# EAGLE board ME433 (EAGLE 7.3.0)
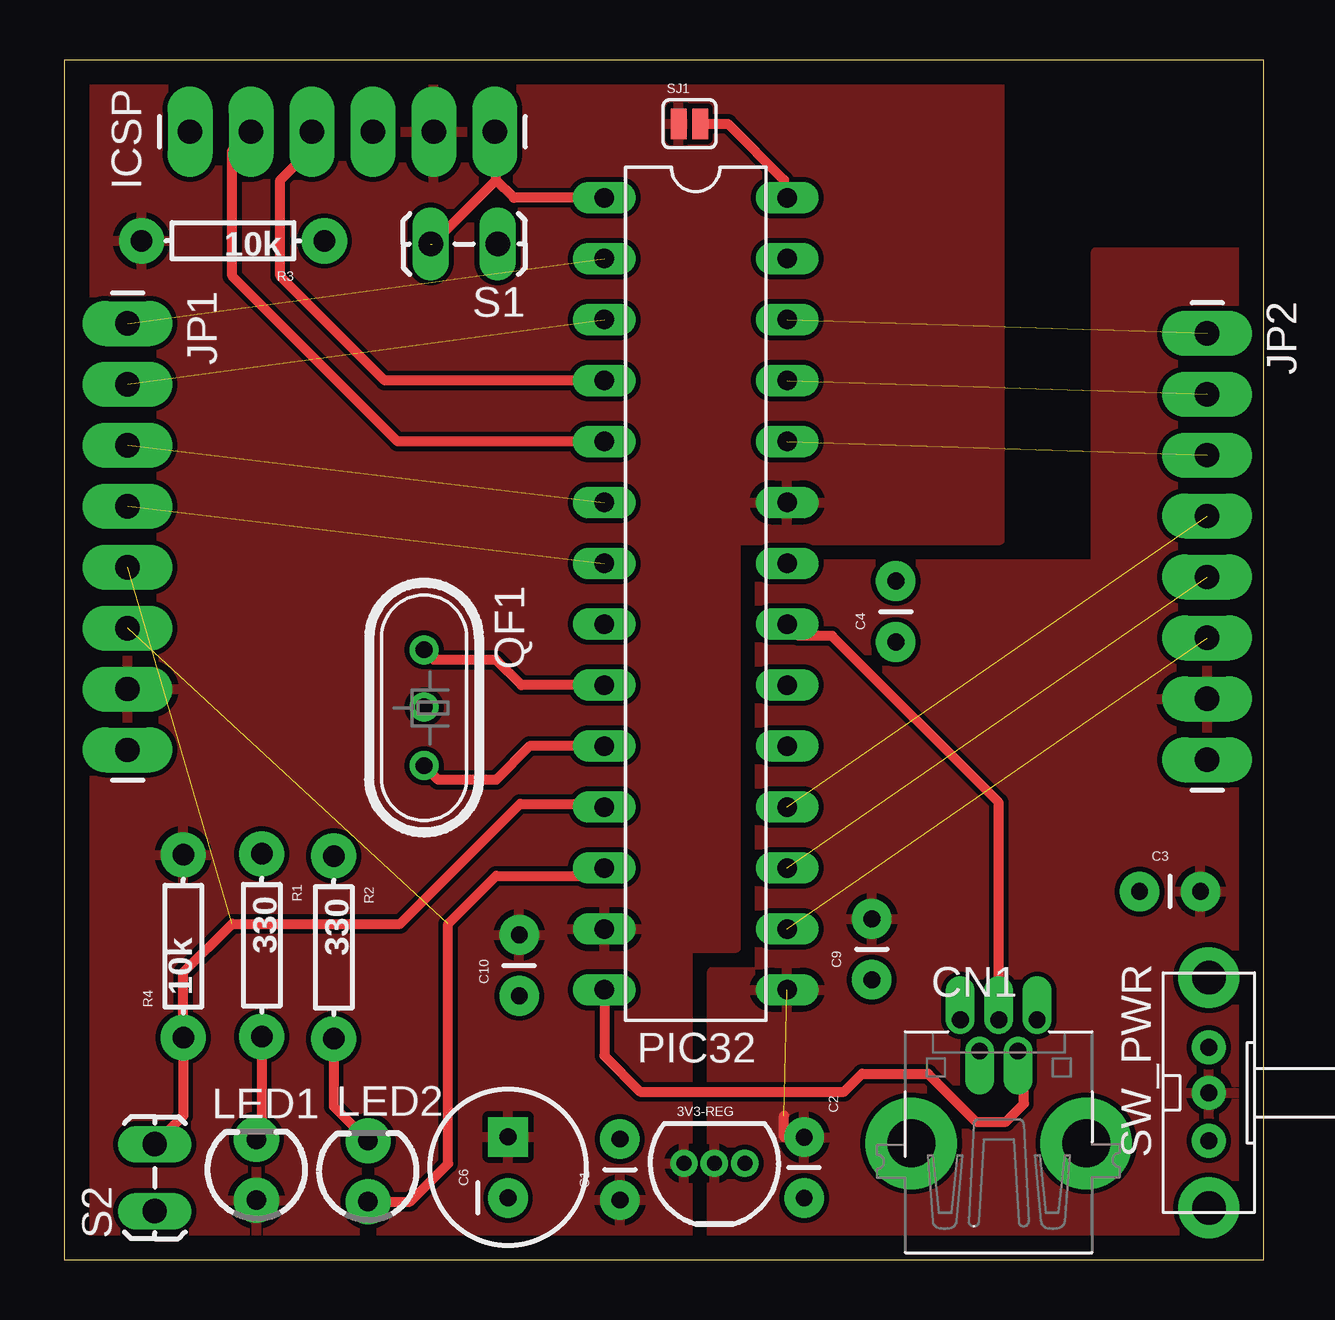
[diagram p0: board, top side]
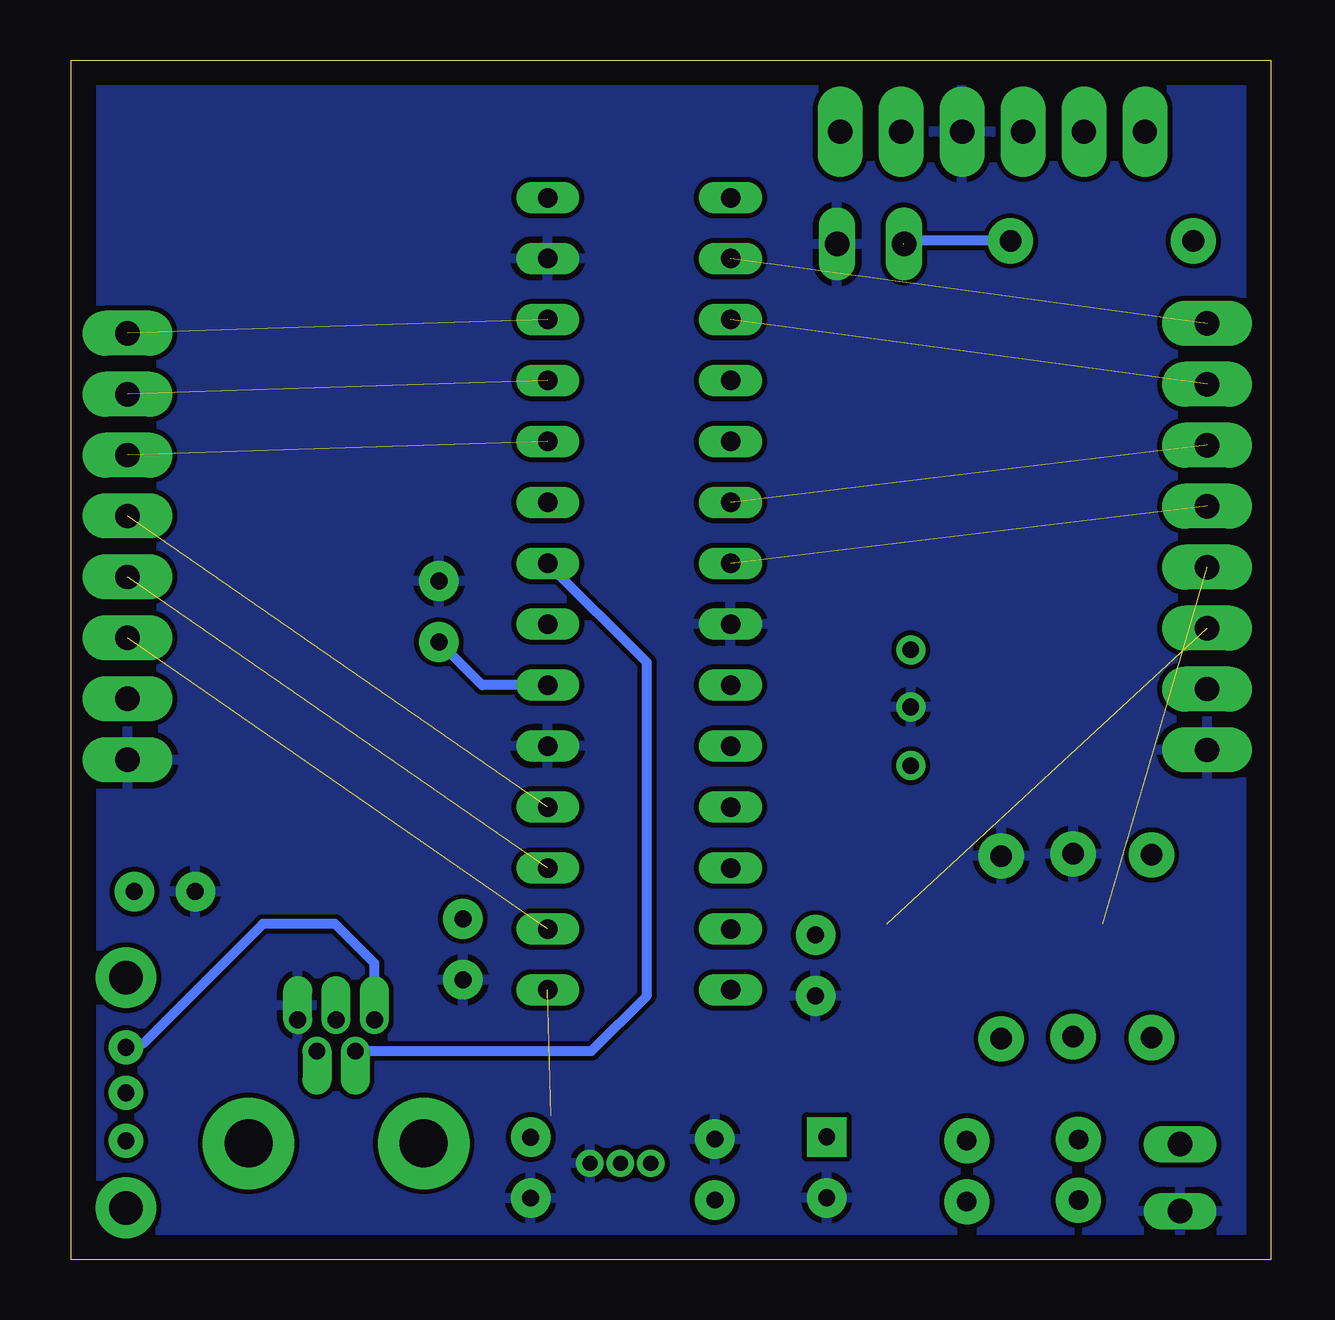
[diagram p1: board, bottom side, seen from below]

Size 50 x 50 mm. Coordinates in mm from the lower left corner, seen from the top.
Outline: 0,0 50,0 50,50 0,50 0,0
Copper layers (1*16): Top 0.035mm / dielectric 1.5mm / Bottom 0.035mm
Design rules "default": minimum track width 10mil, minimum drill 24mil, track to track 8mil, track to pad 8mil, pad to pad 8mil, via to via 8mil, smd to smd 8mil, copper to edge 40mil, drill to drill 8mil, minimum pad ring 10mil, minimum via ring 8mil, stop-mask expansion 4mil, vias tented up to drill 0mil, thermal gap 10mil

## Footprints (pad centres in the part's own frame; a part is rotated, then mirrored left to right if it is on the bottom)
TO-92 = drill 0.635 pad 1.016: 1 1.27,0; 2 0,0; 3 -1.27,0
CAP-PTH-SMALL = drill 0.7 pad 1.651: 1 0,0; 2 2.54,0
CPOL-RADIAL-100UF-25V = drill 0.7 pad 1.651 square: 1 1.27,0 | drill 0.7 pad 1.651: 2 -1.27,0
USB-MINIB-THM-MOLEX = drill 0.7 offset: D+ 0,9.72; D- -0.8,8.42; GND 1.6,9.72; ID 0.8,8.42; VBUS -1.6,9.72 | drill 2 pad 3.81: GND1 -3.65,4.57; GND4 3.65,4.57
1X06_LONGPADS = drill 1.016 pad 1.88 long: 1 0,0; 2 2.54,0; 3 5.08,0; 4 7.62,0; 5 10.16,0; 6 12.7,0
1X08_LONGPADS = drill 1.016 pad 1.88 long: 1 0,0; 2 2.54,0; 3 5.08,0; 4 7.62,0; 5 10.16,0; 6 12.7,0; 7 15.24,0; 8 17.78,0
LED3MM = drill 0.813 pad 1.88: A -1.27,0; K 1.27,0
DIP28 = drill 0.813 long: 1 -6.35,-3.81; 2 -3.81,-3.81; 3 -1.27,-3.81; 4 1.27,-3.81; 5 3.81,-3.81; 6 6.35,-3.81; 7 8.89,-3.81; 8 11.43,-3.81; 9 13.97,-3.81; 10 16.51,-3.81; 11 19.05,-3.81; 12 21.59,-3.81; 13 24.13,-3.81; 14 26.67,-3.81; 15 26.67,3.81; 16 24.13,3.81; 17 21.59,3.81; 18 19.05,3.81; 19 16.51,3.81; 20 13.97,3.81; 21 11.43,3.81; 22 8.89,3.81; 23 6.35,3.81; 24 3.81,3.81; 25 1.27,3.81; 26 -1.27,3.81; 27 -3.81,3.81; 28 -6.35,3.81
HC49U = drill 0.7 pad 1.2: 1 -2.413,0; 2 -0.027,0; 3 2.413,0
AXIAL-0.3 = drill 0.9 pad 1.88: P$1 -3.81,0; P$2 3.81,0
1X02_LOCK_LONGPADS = drill 1.016 long: 1 -0.127,0; 2 2.667,0
SJ_2S = smd 0.635 x 1.27: 1 -0.45,0; 2 0.45,0
EG1213 = drill 0.7 pad 1.422: 1 -2,0; 2 0,0; 3 1.9,0 | drill 1.4 pad 2.54: MT1 -4.8,0; MT2 4.8,0

## Placement (x,y rotation side)
3V3-REG  3V3-REG-TO92  [TO-92]  27.1,4.01 180 top
C1  0.1uF  [CAP-PTH-SMALL]  23.16,2.48 90 top
C2  0.1uF  [CAP-PTH-SMALL]  30.84,5.1 270 top
C3  0.1uF  [CAP-PTH-SMALL]  44.82,15.34 0 top
C4  0.1uF  [CAP-PTH-SMALL]  34.66,25.74 90 top
C6  10uF  [CPOL-RADIAL-100UF-25V]  18.5,3.84 90 top
C9  0.1uF  [CAP-PTH-SMALL]  33.66,11.66 90 top
C10  0.1uF  [CAP-PTH-SMALL]  18.96,10.99 90 top
CN1  [USB-MINIB-THM-MOLEX]  38.95,0.27 0 top
ICSP  [1X06_LONGPADS]  17.94,47.01 180 top
JP1  [1X08_LONGPADS]  2.64,39.02 270 top
JP2  [1X08_LONGPADS]  47.64,38.61 270 top
LED1  [LED3MM]  8.01,3.74 90 top
LED2  [LED3MM]  12.66,3.68 90 top
PIC32  PIC32MX250F128B-DIP  [DIP28]  26.32,37.91 270 top
QF1  8M  [HC49U]  15,23 270 top
R1  330  [AXIAL-0.3]  8.23,13.1 270 top
R2  330  [AXIAL-0.3]  11.23,13.01 270 top
R3  10k  [AXIAL-0.3]  7.03,42.46 180 top
R4  10k  [AXIAL-0.3]  4.96,13.06 90 top
S1  PUSH_BUT  [1X02_LOCK_LONGPADS]  17.94,42.33 180 top
S2  PUSH_BUT  [1X02_LOCK_LONGPADS]  3.77,2.14 90 top
SJ1  SOLDERJUMPERNC  [SJ_2S]  26.06,47.34 0 top
SW_PWR  [EG1213]  47.71,6.95 90 top

## Library data of the parts
3V3-REG PIC32 S1 S2 = Francis-Project
C1-C4 C9 C10 = SparkFun-Capacitors
C6 ICSP JP1 JP2 LED1 LED2 SJ1 = SparkFun
CN1 SW_PWR = adafruit
QF1 = crystal; OC_FARNELL: unknown; OC_NEWARK: unknown
R1-R4 = SparkFun-Resistors

## Nets
5V: 3V3-REG.2 C2.1 C3.2 C9.2 JP2.7 PIC32.15 SW_PWR.2
!MCLR: ICSP.1 PIC32.1 R3.P$1 S1.2
+3V3: 3V3-REG.1 C1.1 C6.1 C10.2 ICSP.2 JP1.7 LED1.A PIC32.13 PIC32.23 R3.P$2 R4.P$2 SJ1.1
AVDD: PIC32.28 SJ1.2
GND: 3V3-REG.3 C1.2 C2.2 C3.1 C4.2 C6.2 C9.1 C10.1 CN1.GND ICSP.3 JP1.8 JP2.8 PIC32.8 PIC32.19 PIC32.27 QF1.2 R1.P$1 R2.P$1 S1.1 S2.1
N$1: PIC32.9 QF1.1
N$2: PIC32.10 QF1.3
N$3: LED2.K R2.P$2
N$8: C4.1 PIC32.20
N$12: LED1.K R1.P$2
N$13: CN1.VBUS SW_PWR.3
PGC: ICSP.5 PIC32.5
PGD: ICSP.4 PIC32.4
RA0: JP1.1 PIC32.2
RA1: JP1.2 PIC32.3
RA4: JP1.6 LED2.A PIC32.12
RB2: JP1.3 PIC32.6
RB3: JP1.4 PIC32.7
RB4: JP1.5 PIC32.11 R4.P$1 S2.2
RB7: JP2.6 PIC32.16
RB8: JP2.5 PIC32.17
RB9: JP2.4 PIC32.18
RB13: JP2.3 PIC32.24
RB14: JP2.2 PIC32.25
RB15: JP2.1 PIC32.26
USB_D+: CN1.D+ PIC32.21
USB_D-: CN1.D- PIC32.22
USB_ID: CN1.ID PIC32.14

## Tracks (layer width: path | path; a pad name or v marks a point on that pad's centre or on a via)
5V  (1 unrouted)
  Top 0.406: C2.1 30,5.1 30,6
  pour Top: 27,1 27,12 29,12 29,29 43,29 43,42 49,42 49,1
!MCLR  (1 unrouted)
  Top 0.406: 15.27,42.46 S1.2 | 15.33,42.33 16,43 18,45 | 18,45 18,46.95 ICSP.1 | PIC32.1 18.74,44.26 18,45
  Bottom 0.406: R3.P$1 15.14,42.46 S1.2
+3V3
  pour Top: 1,1 26,1 26,13 28,13 28,30 39,30 39,49 1,49
AVDD
  Top 0.406: SJ1.2 27.66,47.34 30,45 30,44.39 PIC32.28
GND
  pour Bottom: 1,49 1,1 49,1 49,49
N$1
  Top 0.406: PIC32.9 19.06,23.94 18,25 15.41,25 QF1.1
N$2
  Top 0.406: PIC32.10 19.4,21.4 18,20 15.59,20 QF1.3
N$3
  Top 0.406: R2.P$2 11.23,6.38 LED2.K
N$8
  Bottom 0.406: PIC32.20 32.86,23.94 C4.1
N$12
  Top 0.406: R1.P$2 8.23,5.23 LED1.K
N$13
  Bottom 0.406: CN1.VBUS 37.35,12.35 39,14 42,14 47,9 47.56,9 SW_PWR.3
PGC
  Top 0.406: PIC32.5 13.9,34.1 7,41 7,46.23 ICSP.5
PGD
  Top 0.406: PIC32.4 13.36,36.64 9,41 9,45 10,46 10,46.69 ICSP.4
RA0  (1 unrouted)
RA1  (1 unrouted)
RA4  (1 unrouted)
  Top 0.406: LED2.A 14.41,2.41 16,4 16,14 18,16 22.19,16 PIC32.12
RB2  (1 unrouted)
RB3  (1 unrouted)
RB4  (1 unrouted)
  Top 0.406: S2.2 4.96,6 R4.P$1 4.96,11.96 7,14 14,14 19,19 22.37,19 PIC32.11
RB7  (1 unrouted)
RB8  (1 unrouted)
RB9  (1 unrouted)
RB13  (1 unrouted)
RB14  (1 unrouted)
RB15  (1 unrouted)
USB_D+
  Top 0.406: CN1.D+ 38.95,19.05 32,26 30.61,26 PIC32.21
USB_D-
  Bottom 0.406: CN1.D- 28.31,8.69 26,11 26,24.89 PIC32.22
USB_ID
  Top 0.406: PIC32.14 22.51,8.49 24,7 32.5,7 33.25,7.75 36,7.75 38,5.75 39.25,5.75 40,6.5 40,8.44 CN1.ID